# Altium PCB 85VAC-265VAC 6W 5V SMPS FLAYBACK.PcbDoc
Units mm, origin at the board's own origin, x right, y up, seen from the top; angles counter-clockwise.
Board outline 104.5 x 41.75 mm, 2 copper layers (Top Layer, Bottom Layer); 32 components, 22 nets, 81 pads, 0 vias.
Unrouted connection lines stored in the file: 1.
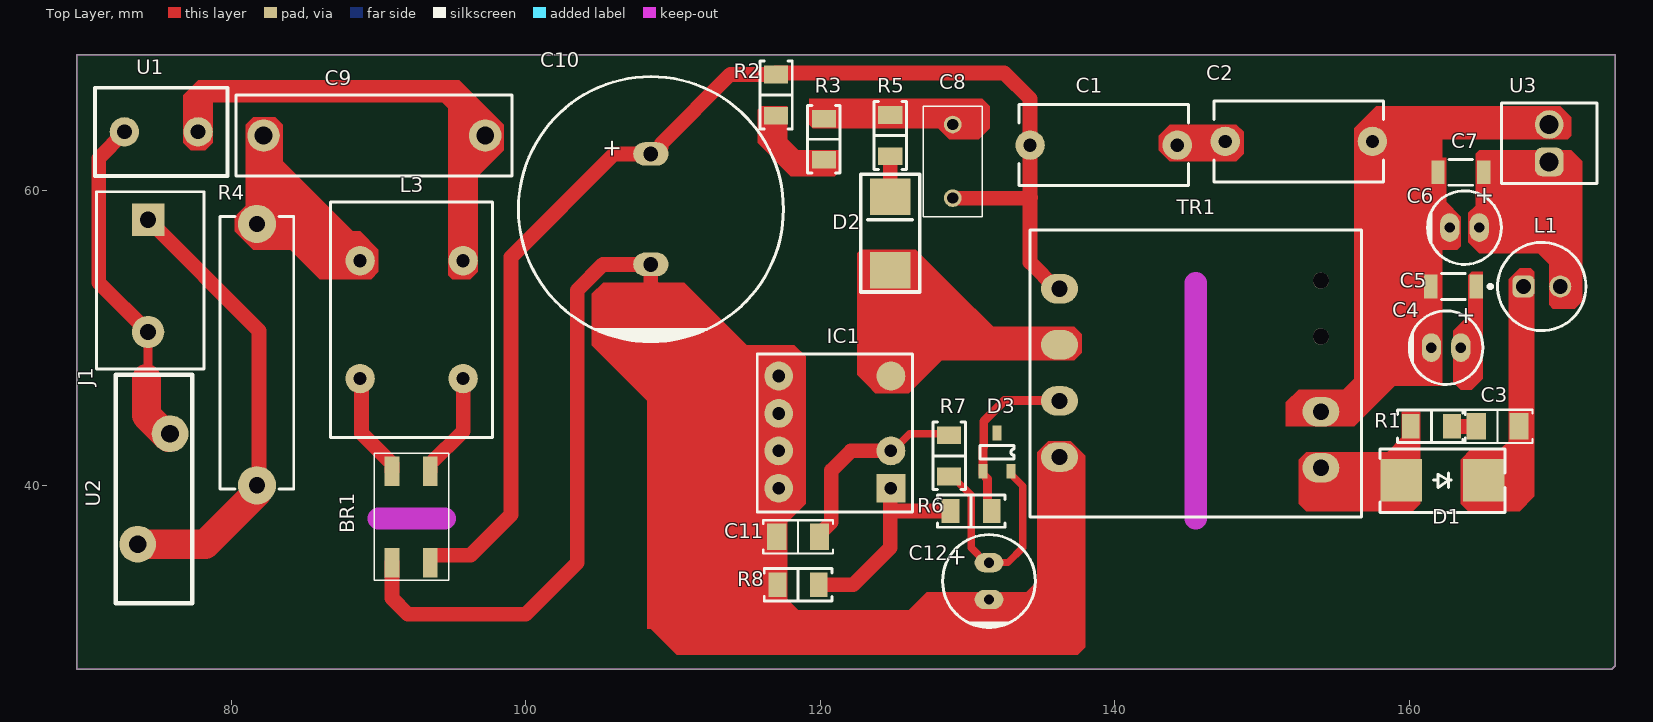
[diagram p0: Top Layer view]
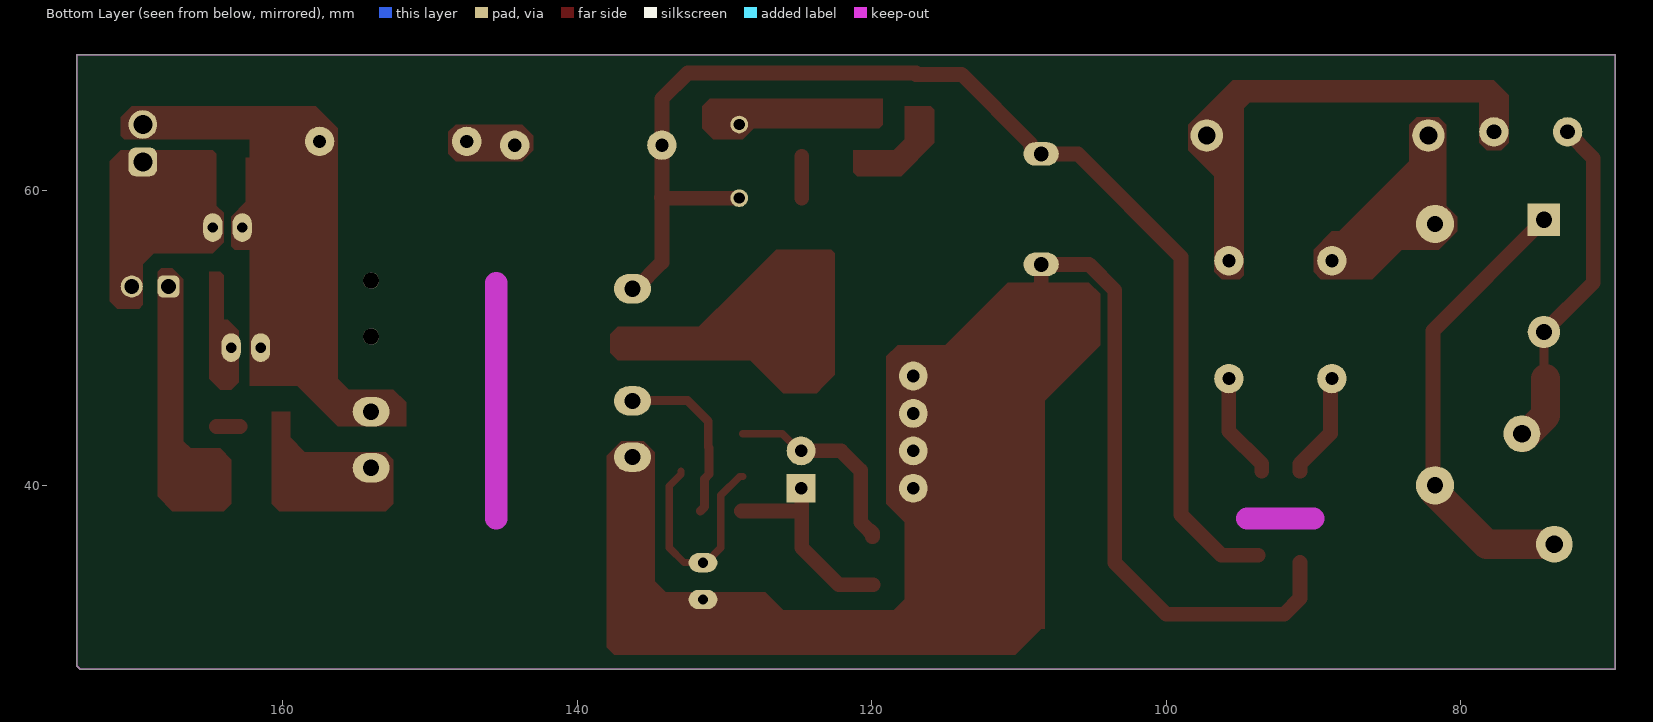
[diagram p1: Bottom Layer view, seen from below]
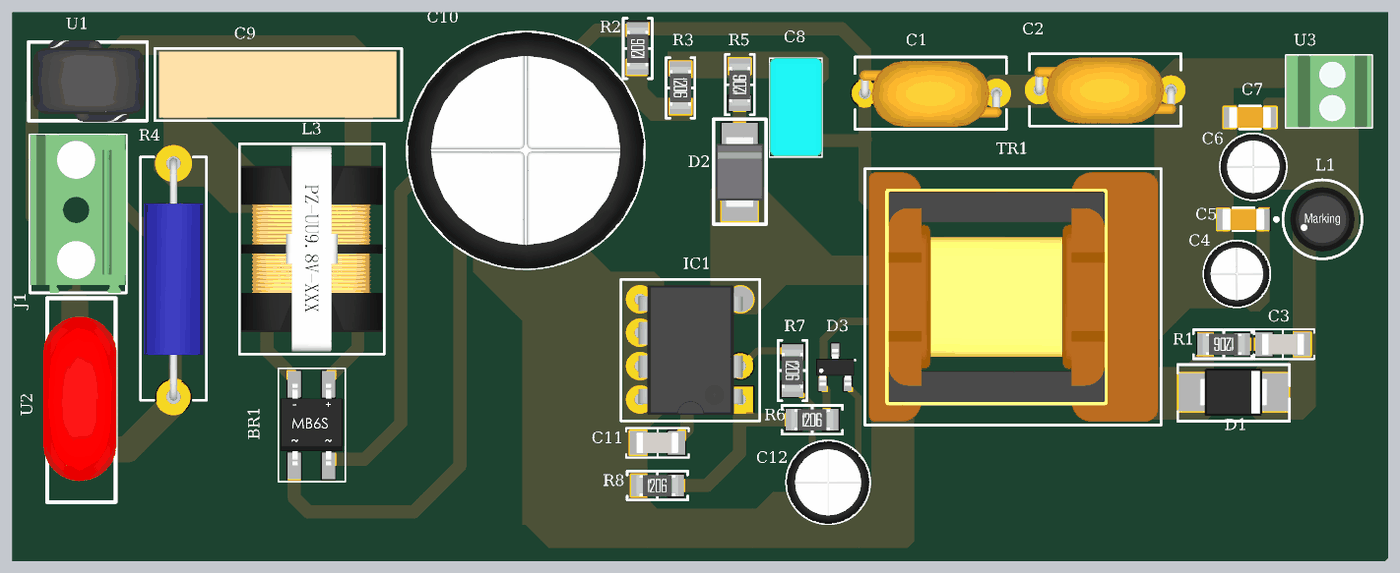
[diagram p2: 3D render of the assembled board from above, using the file's embedded part models]

## Layer stack, top to bottom
Top Solder: solder mask 0.0102, Solder Resist, Dk 3.5
Top Layer: signal copper 0.0356
Dielectric 1: dielectric 0.32, FR-4, Dk 4.8
Bottom Layer: signal copper 0.0356
Bottom Solder: solder mask 0.0102, Solder Resist, Dk 3.5

## Board outline
69.5,27.5 69.5,69.25 174,69.25 174,27.75 173.75,27.5

## Design rules (kind name [scope] priority, off if disabled: settings)
Clearance GenelClearance [All] p1: gap=0.3 ignorepadtopadclearanceinfootprint=FALSE
Clearance Izole [InNetClass('izole') vs not InNetClass('izole')] p2: gap=5 ignorepadtopadclearanceinfootprint=FALSE
Clearance YuksekGerilim [InNetClass('YG') vs InNetClass('YG') OR InNetClass('AG')] p3: gap=2.5 ignorepadtopadclearanceinfootprint=FALSE
PolygonConnect [All] p1: connectstyle=Relief reliefconductorwidth=0.254 reliefentries=4 polygonreliefangle="90 Angle" airgapwidth=0.254
RoutingVias [All] p1: holewidth=0.5 width=0.8 viastyle="Through Hole" minholewidth=0.3 minwidth=0.5 maxholewidth=1 maxwidth=2
SolderMaskExpansion [All] p1: expansion=0.102 istentingtop=FALSE
Width [All] p1: maxlimit=2 minlimit=0.254 preferedwidth=0.5
30 further rules are at their usual default settings.

## Classes and differential pairs
net class YG: NetBR1_1 NetBR1_2 NetBR1_4 NetC8_1 NetC9_2 NetD2_1 NetJ1_1 NetJ1_2
net class izole: GND NetC3_1 NetC3_2 NetD1_1 VCC
net class AG: NetBR1_3 NetC11_2 NetC12_1 NetD3_1 NetR6_1

## Components (designator, comment, footprint, x,y, rotation, side; value= is the part's Value field where it differs from the comment)
BR1 "MB6S" TO269AA 92.25,38.75 r0 top
C1 "1n" C-Y1-P:10 139.25,63.85 r180 top
C2 "1n" C-Y1-P:10 152.5,64.1 r180 top
C3 "" "CAP 1206_3216 - 0.8MM" 166,44 r180 top value=100pF
C4 "" "CAP TH ALUM ELEC D5.00mm S2.00mm H11.00mm" 162.5,49.35 r0 top value=4.7µF
C5 "unused" WCAP-CSGP_1206_L3.2W1.6H0.8 163,53.5 r0 top
C6 "" "CAP TH ALUM ELEC D5.00mm S2.00mm H11.00mm" 163.75,57.5 r0 top value=4.7µF
C7 "unused" WCAP-CSGP_1206_L3.2W1.6H0.8 163.5,61.25 r0 top
C8 "100nF" RCE7U2J333J5B1H03B 129,64.5 r270 top
C9 "C-X2-P:15" C-X2-P:15 82.575,63.75 r0 top
C10 "68uF" "CAP TH ALUM ELEC D18.00mm S7.50mm H42.00mm" 108.5,58.75 r90 top
C11 "" "CAP 1206_3216 - 0.8MM" 118.5,36.5 r0 top value="1 µF"
C12 "10uF" "CAP TH ALUM ELEC D6.30mm S2.50mm H6.00mm" 131.461,33.495 r90 top
D1 "D-SMB-B2100-13-F" D-SMB-B2100-13-F 162.25,40.35 r0 top
D2 "US1M" DO-214AA(SMB) 124.75,57.1 r90 top
D3 "D-SOT23-1N4148" SOT23-3 132,42.25 r180 top
IC1 "LNK625PG" PDIP-8C 121.25,43.35 r270 top
J1 "Header 2pin 7.62mm Vidalı" "Header 2 Pin 7.62mm Vidalı" 74.5,54.25 r270 top
L1 "1000uH, 0.25A" WE-TI_5075 169,53.5 r0 top
L3 "2x65mH 0.25A" RN030923 92.25,51.25 r270 top
R1 "220" "RES 1206_3216" 161.5,44 r180 top
R2 "220K" "RES 1206_3216" 117,66.5 r90 top
R3 "120K" "RES 1206_3216" 120.25,63.5 r270 top
R4 "RES-2W-TH" RES-2W-TH 81.75,49.25 r90 top
R5 "47R" "RES 1206_3216" 124.75,63.75 r90 top
R6 "33K" "RES 1206_3216" 130.25,38.25 r0 top
R7 "12K" "RES 1206_3216" 128.75,42 r270 top
R8 "5.6K" "RES 1206_3216" 118.5,33.25 r0 top
TR1 "EF16-EE1916S-8P" EF16-EE1916S-8P 144.25,47.6 r270 top
U1 "NTC  B57153S0100M000" "NTC B57153S0100" 72.674,64 r0 top
U2 "S10K320" Varistor630V 74.75,43.5 r270 top
U3 "Terminal Blok 2 Pin 2.54mm" "Header 2pin 2.54mm Vidalı" 169.602,61.909 r90 top

## Footprints (in the part's own frame and the unit in brackets; to place one, negate y for a bottom-side part, rotate by r counter-clockwise, add the part's x,y. Pads: shape width x height; smd on the part's side, far side on the other; paste and mask are expansions set on the pad)
C-X2-P:15 [mm]
  round 2.2 hole 1.2: 1(-0.375,0) 2(14.675,0)
  silkscreen extent -2.25,-2.75 16.5,2.75, body extent -1.91,-2.5 16.1,2.5, height 10.49
C-Y1-P:10 [mm]
  round 2 hole 0.9: 1(5,0.75) 2(-5,0.75)
  silkscreen extent -5.75,-2 5.75,3.5, body extent -5.4,-1.7 5.4,3.3, height 14.5
"CAP 1206_3216 - 0.8MM" [mm] "Chip Capacitor, 2-Leads, Body 3.25x1.60mm, IPC Medium Density"
  rect 1.3x1.8 smd: 1(-1.45,0) 2(1.45,0)
  silkscreen extent -2.37,-1.12 2.37,1.12, body extent -1.6,-0.8 1.6,0.8, height 0.8
"CAP TH ALUM ELEC D5.00mm S2.00mm H11.00mm" [mm] "5mm Diameter 2mm Lead Spacing Aluminum Electrolytic Capacitors Radial, Can"
  oval 1.3x1.95 hole 0.7: 1(1,0) 2(-1,0)
  silkscreen extent -2.5,-2.5 2.5,2.5, body extent -2.51,-2.5 2.5,2.5, height 11
"CAP TH ALUM ELEC D6.30mm S2.50mm H6.00mm" [mm] "6.3mm Diameter 2.5mm Lead Spacing Aluminum Electrolytic Capacitors Radial, Can"
  oval 1.3x1.95 hole 0.7: 1(1.25,0) 2(-1.25,0)
  silkscreen extent -3.15,-3.15 3.15,3.15, body extent -3.16,-3.15 3.15,3.15, height 6
"CAP TH ALUM ELEC D18.00mm S7.50mm H42.00mm" [mm] "18mm Diameter 7.5mm Lead Spacing Aluminum Electrolytic Capacitors Radial, Can"
  oval 1.6x2.4 hole 1: 1(3.75,0) 2(-3.75,0)
  silkscreen extent -9,-9 9,9, body extent -9,-9 9,9, height 42
D-SMB-B2100-13-F [mm] "Molded Diode, 2-Leads, Body 4.31x3.62mm, IPC Medium Density"
  rect 2.8x2.9 smd: 1(-2.8,0) 2(2.8,0)
  silkscreen extent -4.25,-2.2 4.25,2.1, body extent -2.6,-1.8 2.6,1.8, height 2.4
DO-214AA(SMB) [mm]
  rect 2.5x2.743 smd: 1(-2.5,0) 2(2.5,0)
  silkscreen extent -3.97,-2 4.02,2, body extent -2.7,-1.8 2.7,1.8, height 2.27
EF16-EE1916S-8P [mm]
  oval 2x2.5 hole 1.1: 1(-5.75,-8) 3(1.87,-8) 4(5.68,-8) 5(6.41,9.75) 6(2.6,9.75)
  oval 2x2.5 smd: 2(-1.94,-8)
  round 1.1 hole 1.1: 7(-2.5,9.75) 8(-6.3,9.75)
  silkscreen extent -9.75,-10 9.75,12.5, body extent -9.5,-9.7 9.5,12.3, height 15.05
"Header 2 Pin 7.62mm Vidalı" [mm]
  rect 2.2x2.2 hole 1.1: 1(-3.78,-0.143)
  round 2.2 hole 1.1: 2(3.84,-0.143)
  silkscreen extent -5.69,-3.64 6.34,3.66, body extent -5.69,-3.64 6.34,3.66, height 9.2
"Header 2pin 2.54mm Vidalı" [mm] "Header 2pin 2.54mm Vidalı"
  rrect50% 1.95x1.95 hole 1.3: 1(0.051,0.102)
  round 1.95 hole 1.3: 2(2.591,0.102)
  silkscreen extent -1.42,-3.15 4.06,3.35, body extent -1.42,-3.15 4.06,3.35, height 8.55
"NTC B57153S0100" [mm] "NTC B57153S0100"
  round 2 hole 1: 1(0.076,0) 2(5.076,0)
  silkscreen extent -1.92,-3 7.08,3, body extent -1.6,-3.07 6.89,3.13, height 13
PDIP-8C [mm]
  rect 1.96x1.96 hole 0.86 mask+0.102: 1(3.55,3.55)
  round 1.96 hole 0.86: 2(1.01,3.55) 5(-4.07,-4.07) 6(-1.53,-4.07) 7(1.01,-4.07) 8(3.55,-4.07)
  round 1.96 smd: 4(-4.07,3.55)
  silkscreen extent -5.58,-5.53 5.18,5.02, body extent -5.13,-4.18 4.7,3.73, height 6.4
RCE7U2J333J5B1H03B [mm]
  round 1.2 hole 0.75: 1(0,0) 2(5,0)
  silkscreen extent -1.25,-2 6.25,2, body extent -1.29,-1.99 6.21,2.01, height 9.75
"RES 1206_3216" [mm] "Chip Resistor, 2-Leads, Body 3.13x1.55mm, IPC Medium Density"
  rect 1.2x1.65 smd: 1(-1.4,0) 2(1.4,0)
  silkscreen extent -2.3,-1.1 2.3,1.1, body extent -1.6,-0.8 1.6,0.8, height 0.6
RES-2W-TH [mm]
  round 2.6 hole 1.1: 1(-9.25,0) 2(8.5,0)
  silkscreen extent -9.5,-2.5 9,2.5, body extent -9.53,-2.24 8.93,2.24, height 4.5
RN030923 [mm] "UU9, 8S2,Pitch 7mm*8mm"
  round 2 hole 0.9 unplated: 1(-4,3.5) 2(4,3.5) 3(4,-3.5) 4(-4,-3.5)
  silkscreen extent -8,-5.5 8,5.5, body extent -7.78,-5.38 7.78,5.38, height 15.45
SOT23-3 [mm] "SOT23-3"
  round 0.2 on Top Overlay: 1(-1.5,-0.55)
  rect 0.6x1 smd: 1(0.95,1.3) 2(-0.95,1.3) 3(0,-1.3)
  silkscreen extent -1.15,-0.45 1.15,0.45, body extent -1.45,-1.4 1.45,1.4, height 1.3
TO269AA [mm]
  rect 1x2 smd: 1(1.27,2.2) 2(-1.33,2.2) 3(-1.33,-4) 4(1.27,-4)
  silkscreen extent -2.54,-5.21 2.54,3.43, body extent -2.35,-3.96 2.35,2.24, height 1.75
Varistor630V [mm]
  round 2.5 hole 1.2: 1(0,1.1) 2(7.5,-1.1)
  silkscreen extent -4,-2.6 11.5,2.6, body extent -2.6,-2.9 9.9,2.7, height 16.25
WCAP-CSGP_1206_L3.2W1.6H0.8 [mm] "Ceramic Capacitors, body 3.2x1.6mm"
  rect 0.9x1.6 smd: 1(-1.55,0) 2(1.55,0)
  silkscreen extent -0.8,-0.87 0.8,0.87, body extent -1.6,-0.8 1.6,0.8, height 0.8
WE-TI_5075 [mm] "Radial Leaded Wire Wound Inductor, body diameter 6mm"
  rrect50% 1.5x1.5 hole 1: 1(-1.25,0)
  round 1.5 hole 1: 2(1.25,0)
  silkscreen extent -3.62,-3 3,3, body extent -2.45,-2.45 2.45,2.45, height 7.63

## Part data
C1 C2: library part C-Y1-P:10
C3 C11: library part CC1206KKX7R8BB105, "CAP CER 1UF 25V X7R 1206", Part Number=CC1206KKX7R8BB105
C4 C6: library part UKT1E4R7MDD, "CAP ALUM 1000UF 20% 25V RADIAL", Capacitance=1000µF, Device Package="Radial, Can", Lifetime @ Temp.="1000 Hrs @ 105°C", manufacturer=Nichicon, Operating Temperature="-55°C ~ 105°C", Ripple Current @ High Frequency="50mA @ 10kHz", Ripple Current @ Low Frequency="25mA @ 120Hz", Supplier Part Number 1=493-16320-ND, Tolerance=±20%, Voltage - Rated=25V, Applications=Audio, componentlink1description=Datasheet, componentlink1url=http://nichicon-us.com/english/products/pdfs/e-ukt.pdf, componentlink2description="DigiKey Link", componentlink2url=http://digikey.com/product-detail/en/nichicon/UKT1E4R7MDD/493-16320-ND/1964342, Height - Seated (Max)="0.433\" (11.00mm)", lastupdated="4.09.2020 23:28:56", Lead Spacing="0.079\" (2.00mm)", Lifecycle Status=Active, Minimum Order=1, Mounting Type="Through Hole", Package / Case="Radial, Can", packaging=Bulk, Part Number=UKT1E4R7MDD, Part Status=Active, partid=21396, Polarization=Polar, price=0.34, series=UKT, Size / Dimension="0.197\" Dia (5.00mm)", Supplier 1=DigiKey
C5 C7: library part 885012008026, "WCAP-CSGP Multilayer Ceramic Chip Capacitor, General Purpose, size 1206, NP0, 1nF, 25VDC", Capacitance=1nF, Capacitance Tolerance=+/-5%, Case/Size Code=1206, manufacturer="Wurth Elektronik", Operating Temperature Max=125°C, Operating Temperature Min=-55°C, Rated Voltage (DC)=25V, Insulation Resistance=10GOhm, Category="Multilayer Ceramic Chip Capacitors", Ceramic Type=NP0, componentlink1description="Website Link", componentlink1url=https://www.we-online.com/redexpert/article/885012008026?ad, componentlink2description="Datasheet Link", componentlink2url=https://www.we-online.com/redexpert/spec/885012008026?ad, Height=0.8mm, Length=3.2mm, Manufacturer Part Number=885012008026, Match Code=WCAP-CSGP, Mount="Surface Mount", packaging="Tape and Reel", Q Factor=1000, Technical Reference=NP01206102J025DFCT10000, Width=1.6mm
C8: library part "C Seramik 100nF 1kV X7R 5mm", "490-8944-ND", LatestRevisionDate=17-Jul-2002, LatestRevisionNote="Re-released for DXP Platform.", PackageDescription="Radial Cap, Thru-Hole; 2 Leads; 0.3 in Pin Spacing", PackageReference=RAD-0.3, Published=8-Jun-2000, Publisher="Altium Limited"
C9: "CAP-X2-R15-17.5x7.5"
C10: library part EEU-EE2W680, "CAP ALUM 68UF 20% 450V RADIAL", Part Number=EEU-EE2W680
C12: library part UMA1H100MDD, "CAP ALUM 10UF 20% 50V RADIAL", Part Number=UMA1H100MDD
D2: "SMA"
J1: "691214410002", Operating Temperature="-40 to +105degC", Part Number=691218410002, Rated Current [UL]=30A, Working Voltage [UL]=300VAC, Application="Rising Cage Clamp", Compliance="Lead free / RoHS", componentlink1description=Manufacturer, componentlink1url=http://www.we-online.de, componentlink2description=Datasheet, componentlink2url=https://katalog.we-online.de/em/datasheet/691218410002.pdf, Modularity=Yes, Mounting Technology=THT, packaging=Box, PCB/Cable/Panel=PCB, Pin Number=2, Pitch=7.62mm, Published Date="October 2019", Publisher="Wurth Elektronik", Type=Horizontal
L1: library part 7447462102, "WE-TI Radial Leaded Wire Wound Inductor, size 5075, 1000uH, 0.25A, 6Ohm", Case/Size Code=5075, DC Resistance=4.38Ohm, DC Resistance Max=6Ohm, manufacturer="Wurth Elektronik", Operating Temperature Max=125°C, Operating Temperature Min=-40°C, Rated Current=0.25A, Saturation Current=0.27A, Self Resonant Frequency=1.8MHz, Inductance=1000uH, Category="Power Inductors", componentlink1description="Website Link", componentlink1url=https://www.we-online.com/redexpert/article/7447462102?ad, componentlink2description="Datasheet Link", componentlink2url=https://www.we-online.com/redexpert/spec/7447462102?ad, Diameter=6mm, Height=8.5mm, Manufacturer Part Number=7447462102, Match Code=WE-TI, Mount="Through Hole", packaging=Tray
L3: "Line Filter RN030923"
R1 R3 R6: library part RMCF1206JT120K, "RES 120K OHM 5% 1/4W 1206", Part Number=RMCF1206JT120K
R2: library part RT1206BRD07220KL, "RES SMD 220K OHM 0.1% 1/4W 1206", Part Number=RT1206BRD07220KL
R5: library part AC1206JR-0747RL, "RES SMD 47 OHM 5% 1/4W 1206", Part Number=AC1206JR-0747RL
R7: library part RMCF1206JT120K, "RES 12K OHM 5% 1/4W 1206", Part Number=RMCF1206JT120K
R8: library part RMCF1206JT120K, "RES 5.6K OHM 5% 1/4W 1206", Part Number=RMCF1206JT120K
U1: library part "NTC 10R 2A 8.5mm", "495-2076-ND", LatestRevisionDate=17-Jul-2002, LatestRevisionNote="Re-released for DXP Platform.", PackageDescription="Axial Device, Thru-Hole; 2 Leads; 0.4 in Pin Spacing", PackageReference=AXIAL-0.4, Published=8-Jun-2000, Publisher="Altium Limited"
U2: library part "Varistor S10K320", LatestRevisionDate=17-Jul-2002, LatestRevisionNote="Re-released for DXP Platform.", PackageDescription="Axial Device, Thru-Hole; 2 Leads; 0.4 in Pin Spacing", PackageReference=AXIAL-0.4, Published=8-Jun-2000, Publisher="Altium Limited"
U3: library part "Header 2 Pin 2.54mm Vidalı", "691210910002", LatestRevisionDate=17-Jul-2002, LatestRevisionNote="Re-released for DXP Platform.", Publisher="Altium Limited"

## Nets (pads, with @x,y where several pads share a name; then routed paths per layer and width w, separated by ;. In a path a pad name is that pad's centre, name@x,y a point inside that pad or via, vN(x,y) a via of type N, cw(c..) or ccw(c..) an arc to the next point about the centre after c; other vN are vias at no path point)
GND: C2.2 C4.2 C5.1 C6.2 C7.1 TR1.6 U3.2
NetBR1_1: BR1.1 L3.2 | length 7.2
  Top Layer w1: BR1.1 93.52,41.45 95.75,43.68 L3.2@95.75,47 ; L3.2@95.5,47.5 L3.2@95.75,47.5
NetBR1_2: BR1.2 L3.3 | length 7.2
  Top Layer w1: L3.3 88.851,47.149 88.851,43.519 90.92,41.45 BR1.2
NetBR1_3: BR1.3 C10.2 C11.1 C12.2 IC1.5 IC1.6 IC1.7 IC1.8 R8.1 TR1.4 | length 43.2
  Top Layer w1: BR1.3 90.92,32.33 92,31.25 100,31.25 103.5,34.75 103.5,53.25 105.25,55 C10.2 108.5,53.25
  Top Layer w1.5: 108.25,53 108.5,53.25
NetBR1_4: BR1.4 C1.1 C8.2 C10.1 R2.2 TR1.1 | length 84.2
  Top Layer w1: BR1.4@93.75,35.25 96.25,35.25 99,38 99,55.5 106,62.5 C10.1 ; C10.1@108.738,62.5 109.2,62.962 109.2,63.2 113.9,67.9 R2.2 ; R2.2@117,68 132.5,68 134.25,66.25 C1.1 ; C8.2@129.038,59.538 C8.2 134.25,59.5 ; C1.1@134,63 134.25,62.75 134.25,59.538 ; C1.1@134.059,63 C1.1@134.059,63.1 ; 134.288,59.538 134.25,59.538 ; TR1.1 136.036,53.35 134.25,55.136 134.25,59.5 ; 134.25,59.5 134.25,59.538
NetC1_2: C1.2 C2.1 | length 3.1
  Top Layer w1: C1.2 144.375,63.225 147.225,63.225 C2.1@147.25,63.25
NetC3_1: C3.1 C4.1 C5.2 D1.2 L1.1 | length 0.7
  Top Layer w0.6: C4.1@163.5,49.5 163.5,49.214 C4.1@163.823,48.891
NetC3_2: C3.2 R1.1 | length 1.6
  Top Layer w1: R1.1 C3.2@164.5,44
NetC8_1: C8.1 R3.1 R5.2
NetC9_1: C9.1 L3.4 R4.2 | length 14
  Top Layer w1: R4.2@81.75,58 81.75,60.5 82.2,60.95 C9.1
  Top Layer w2: R4.2 86.25,57.75 L3.4
NetC9_2: C9.2 L3.1 U1.2 | length 32.4
  Top Layer w1: U1.2 77.75,66 78.5,66.75 94.25,66.75 95.75,65.25 L3.1 ; 95.75,63.75 C9.2
NetC11_2: C11.2 IC1.2 R7.1 | length 13.8
  Top Layer w0.5: IC1.2 124.927,42.34 126.087,43.5 R7.1@128.75,43.5
  Top Layer w1: C11.2 119.95,36.75 120.1,36.9 120.164,36.9 120.75,37.486 120.75,41 122.095,42.345 IC1.2@124.655,42.345
NetC12_1: C12.1 D3.2 R7.2 | length 15.2
  Top Layer w0.5: R7.2 128.975,40.6 130.25,39.325 130.25,35.75 131.25,34.75 C12.1@131.5,34.75 ; C12.1@131.755,34.755 132.755,34.755 133.75,35.75 133.75,39.95 132.95,40.75 D3.2
NetD1_1: D1.1 R1.2 TR1.5 | length 9.1
  Top Layer w1: TR1.5 154.191,40.999 159.249,40.999 D1.1@159.25,41 ; D1.1@160,40.25 160,43.9 R1.2
NetD2_1: D2.1 IC1.4 TR1.2 | length 18.6
  Top Layer w1: IC1.4@124.75,47.5 124.75,49.5 ; D2.1 124.75,49.5 ; TR1.2@136.21,49.5 124.75,49.5
NetD2_2: D2.2 R5.1 | length 2.8
  Top Layer w1: D2.2@124.75,59.5 D2.2 R5.1
NetD3_1: D3.1@131.05,40.95 R6.2 TR1.3 | length 12.1
  Top Layer w0.6: R6.2 131.35,38.55 131.35,40.45 131.05,40.75 131.05,40.95 131.05,42.55 131.1,42.6 131.1,42.801 131.1,44.35 132.5,45.75 TR1.3@136.25,45.75
NetJ1_1: J1.1 R4.1 U2.2 | length 30.8
  Top Layer w1: J1.1 81.887,50.5 81.887,40.137 R4.1
  Top Layer w2: U2.2 78.25,36 R4.1@81.75,39.5
NetJ1_2: J1.2 U1.1 U2.1 | length 23.5
  Top Layer w0.6: 74.25,47.25 74.357,47.357 J1.2
  Top Layer w1: U1.1 72.75,63.964 71,62.214 71,53.767 J1.2
  Top Layer w2: 74.25,47.25 74.25,44.75 U2.1@75.75,43.25
NetR2_1: R2.1 R3.2 | length 5.5
  Top Layer w1: R2.1@117,65 117,63.5 118.552,61.948 119.38,61.948 119.432,62 120.15,62 R3.2
NetR6_1: IC1.1 R6.1 R8.2 | length 14.2
  Top Layer w1: R8.2 122.25,33.25 124.75,35.75 124.75,38.25 ; IC1.1@124.75,40 124.75,38.25 ; R6.1 124.75,38.25
VCC: C6.1 C7.2 L1.2 U3.1
pads on no net: D3.1@133.5,42.8 D3.3 TR1.7 TR1.8

## Keep-outs
Keep-Out Layer:
  lines w0.1: 69.5,27.5 173.75,27.5 174,27.75 174,69.25 69.5,69.25 69.5,68 69.5,30 69.5,27.5
  lines w1.5: 90,37.75 94.5,37.75 ; 145.5,37.75 145.5,53.75

## Other copper
Top Layer:
  region net NetC1_2: 143,63.75 143.75,64.5 148.25,64.5 148.75,64 148.75,62.5 148.25,62 143.75,62 143,62.75 143,63.25
  region net NetC9_2: 96.25,54 96.75,54.5 96.75,61 98.5,62.75 98.5,64.5 95.5,67.5 77.75,67.5 76.75,66.5 76.75,63.25 77.25,62.75 78.25,62.75 78.75,63.25 78.75,66 94.5,66 94.75,65.75 94.75,54.25 95,54
  region net NetC9_1: 81.5,65 81,64.5 81,59 80.25,58.25 80.25,57.25 81.5,56 84,56 86,54 89.5,54 90,54.5 90,56 88.75,57.25 88.25,57.25 83.5,62 83.5,64.5 83,65
  region net NetR2_1: 116,65.75 115.75,65.5 115.75,63.25 118,61 121,61 121.25,61.25 121.25,62.75 118.5,62.75 117.75,63.5 117.75,65.75
  region net NetD2_1: 137.75,49 137.25,48.5 128.25,48.5 126.75,47 126,46.25 123.75,46.25 123.25,46.75 122.5,47.5 122.5,55.75 122.75,56 126.5,56 129.25,53.25 131.75,50.75 137.25,50.75 137.75,50.25
  region net GND: 162.5,62.25 162.5,59.25 163.5,58.25 163.5,56.25 163.25,56 163.248,56.002 162.085,56.002 162.085,61.915 162,62 162.25,62.25
  region net GND: 151.625,44 151.625,45.625 152.5,46.5 155.5,46.5 156.25,47.25 156.25,64.25 157.75,65.75 160.5,65.75 161.75,64.5 162.25,64 162.25,46.75 159,46.75 156.25,44
  region net NetD1_1: 160.25,38.25 153,38.25 152.5,38.75 152.5,41.75 153,42.25 158.5,42.25 159.5,43.25 159.5,45 160.75,45 160.75,38.75
  region net NetC3_1: 168.5,54 168.5,39.25 167.5,38.25 164,38.25 163.5,38.75 163.5,41.75 164.25,42.5 166.25,42.5 166.75,43 166.75,54 167.5,54.75 168.25,54.75 168.5,54.5
  region net NetC3_1: 164.25,54.5 164,54.25 164,51.25 163.75,51.25 163,50.5 163,47 163.5,46.5 164.25,46.5 165,47.25 165,54.5
  region net NetBR1_3: 110.75,53.75 115,49.5 118.25,49.5 119,48.75 119,38.75 117.75,37.5 117.75,32.25 118.5,31.5 126,31.5 127.25,32.75 132.25,32.75 132.5,32.75 132.5,28.5 110.25,28.5 108.5,30.25 108.25,30.25 108.25,45.75 104.5,49.5 104.5,53 105.25,53.75 110,53.75
  region net NetBR1_3: 132.5,32.75 134,32.75 134.75,33.5 134.75,42.25 135.5,43 137,43 138,42 138,29 137.5,28.5 132.5,28.5
  region net GND: 162.25,63.5 160,65.75 170.25,65.75 171,65 171,63.75 170.75,63.5 169.5,63.5
  region net VCC: 169.5,52.25 169.75,52 171.25,52 171.75,52.5 171.75,62 171,62.75 164.75,62.75 164.5,62.5 164.5,59 164,58.5 164,56.5 164.75,55.75 168.75,55.75 169.5,55 169.5,53
  region net NetC8_1: 119.25,66.25 131,66.25 131.5,65.75 131.5,64.25 130.75,63.5 128.75,63.5 128,64.25 119.5,64.25 119.25,64.5

## Text inside footprints (layer, text, board x,y; h text height)
C4: Top Overlay "+" at 163.2,50.6 h2
C6: Top Overlay "+" at 164.45,58.75 h2
C10: Top Overlay "+" at 106.8,62.2 h2 r90
C12: Top Overlay "+" at 130.211,34.445 h2 r90